# Altium PCB Transmitter.PcbDoc (part 1 of 2)
Units mm, origin at the board's own origin, x right, y up, seen from the top; angles counter-clockwise.
Board outline 94.9 x 125.8 mm, 2 copper layers (Top Layer, Bottom Layer); 250 components, 166 nets, 771 pads, 77 vias.
Unrouted connection lines stored in the file: 2.
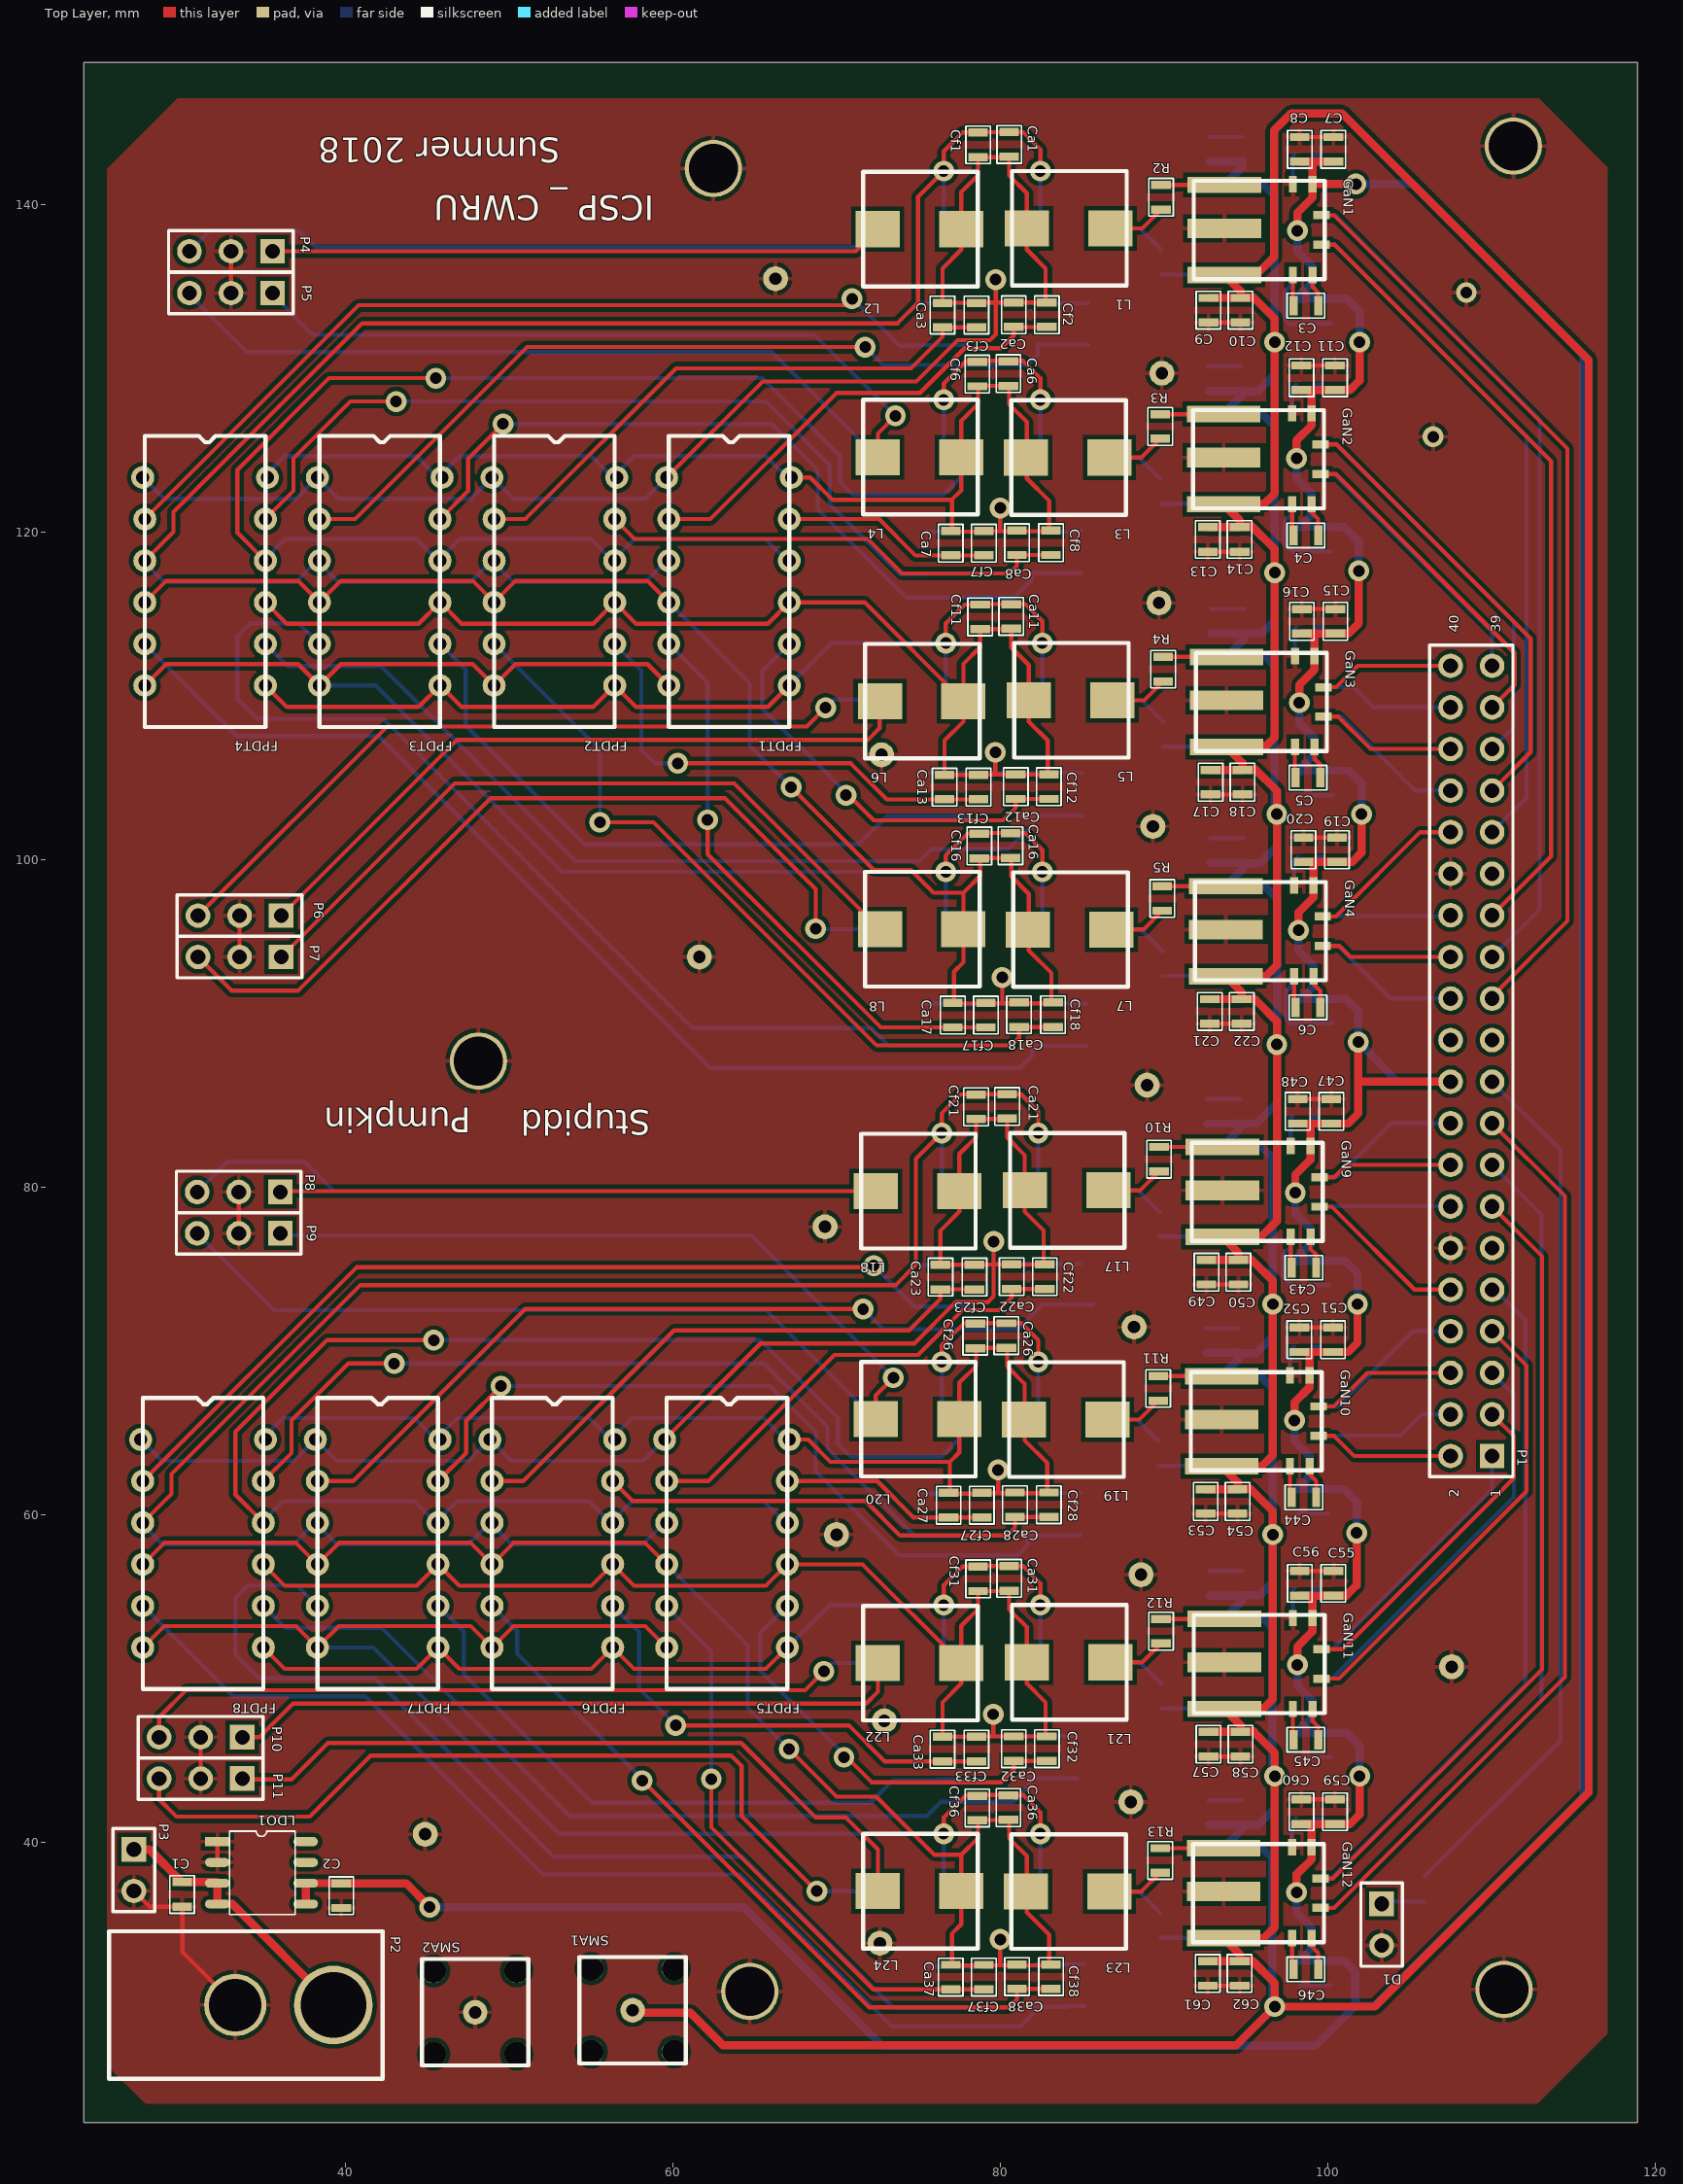
[diagram p0: Top Layer view]
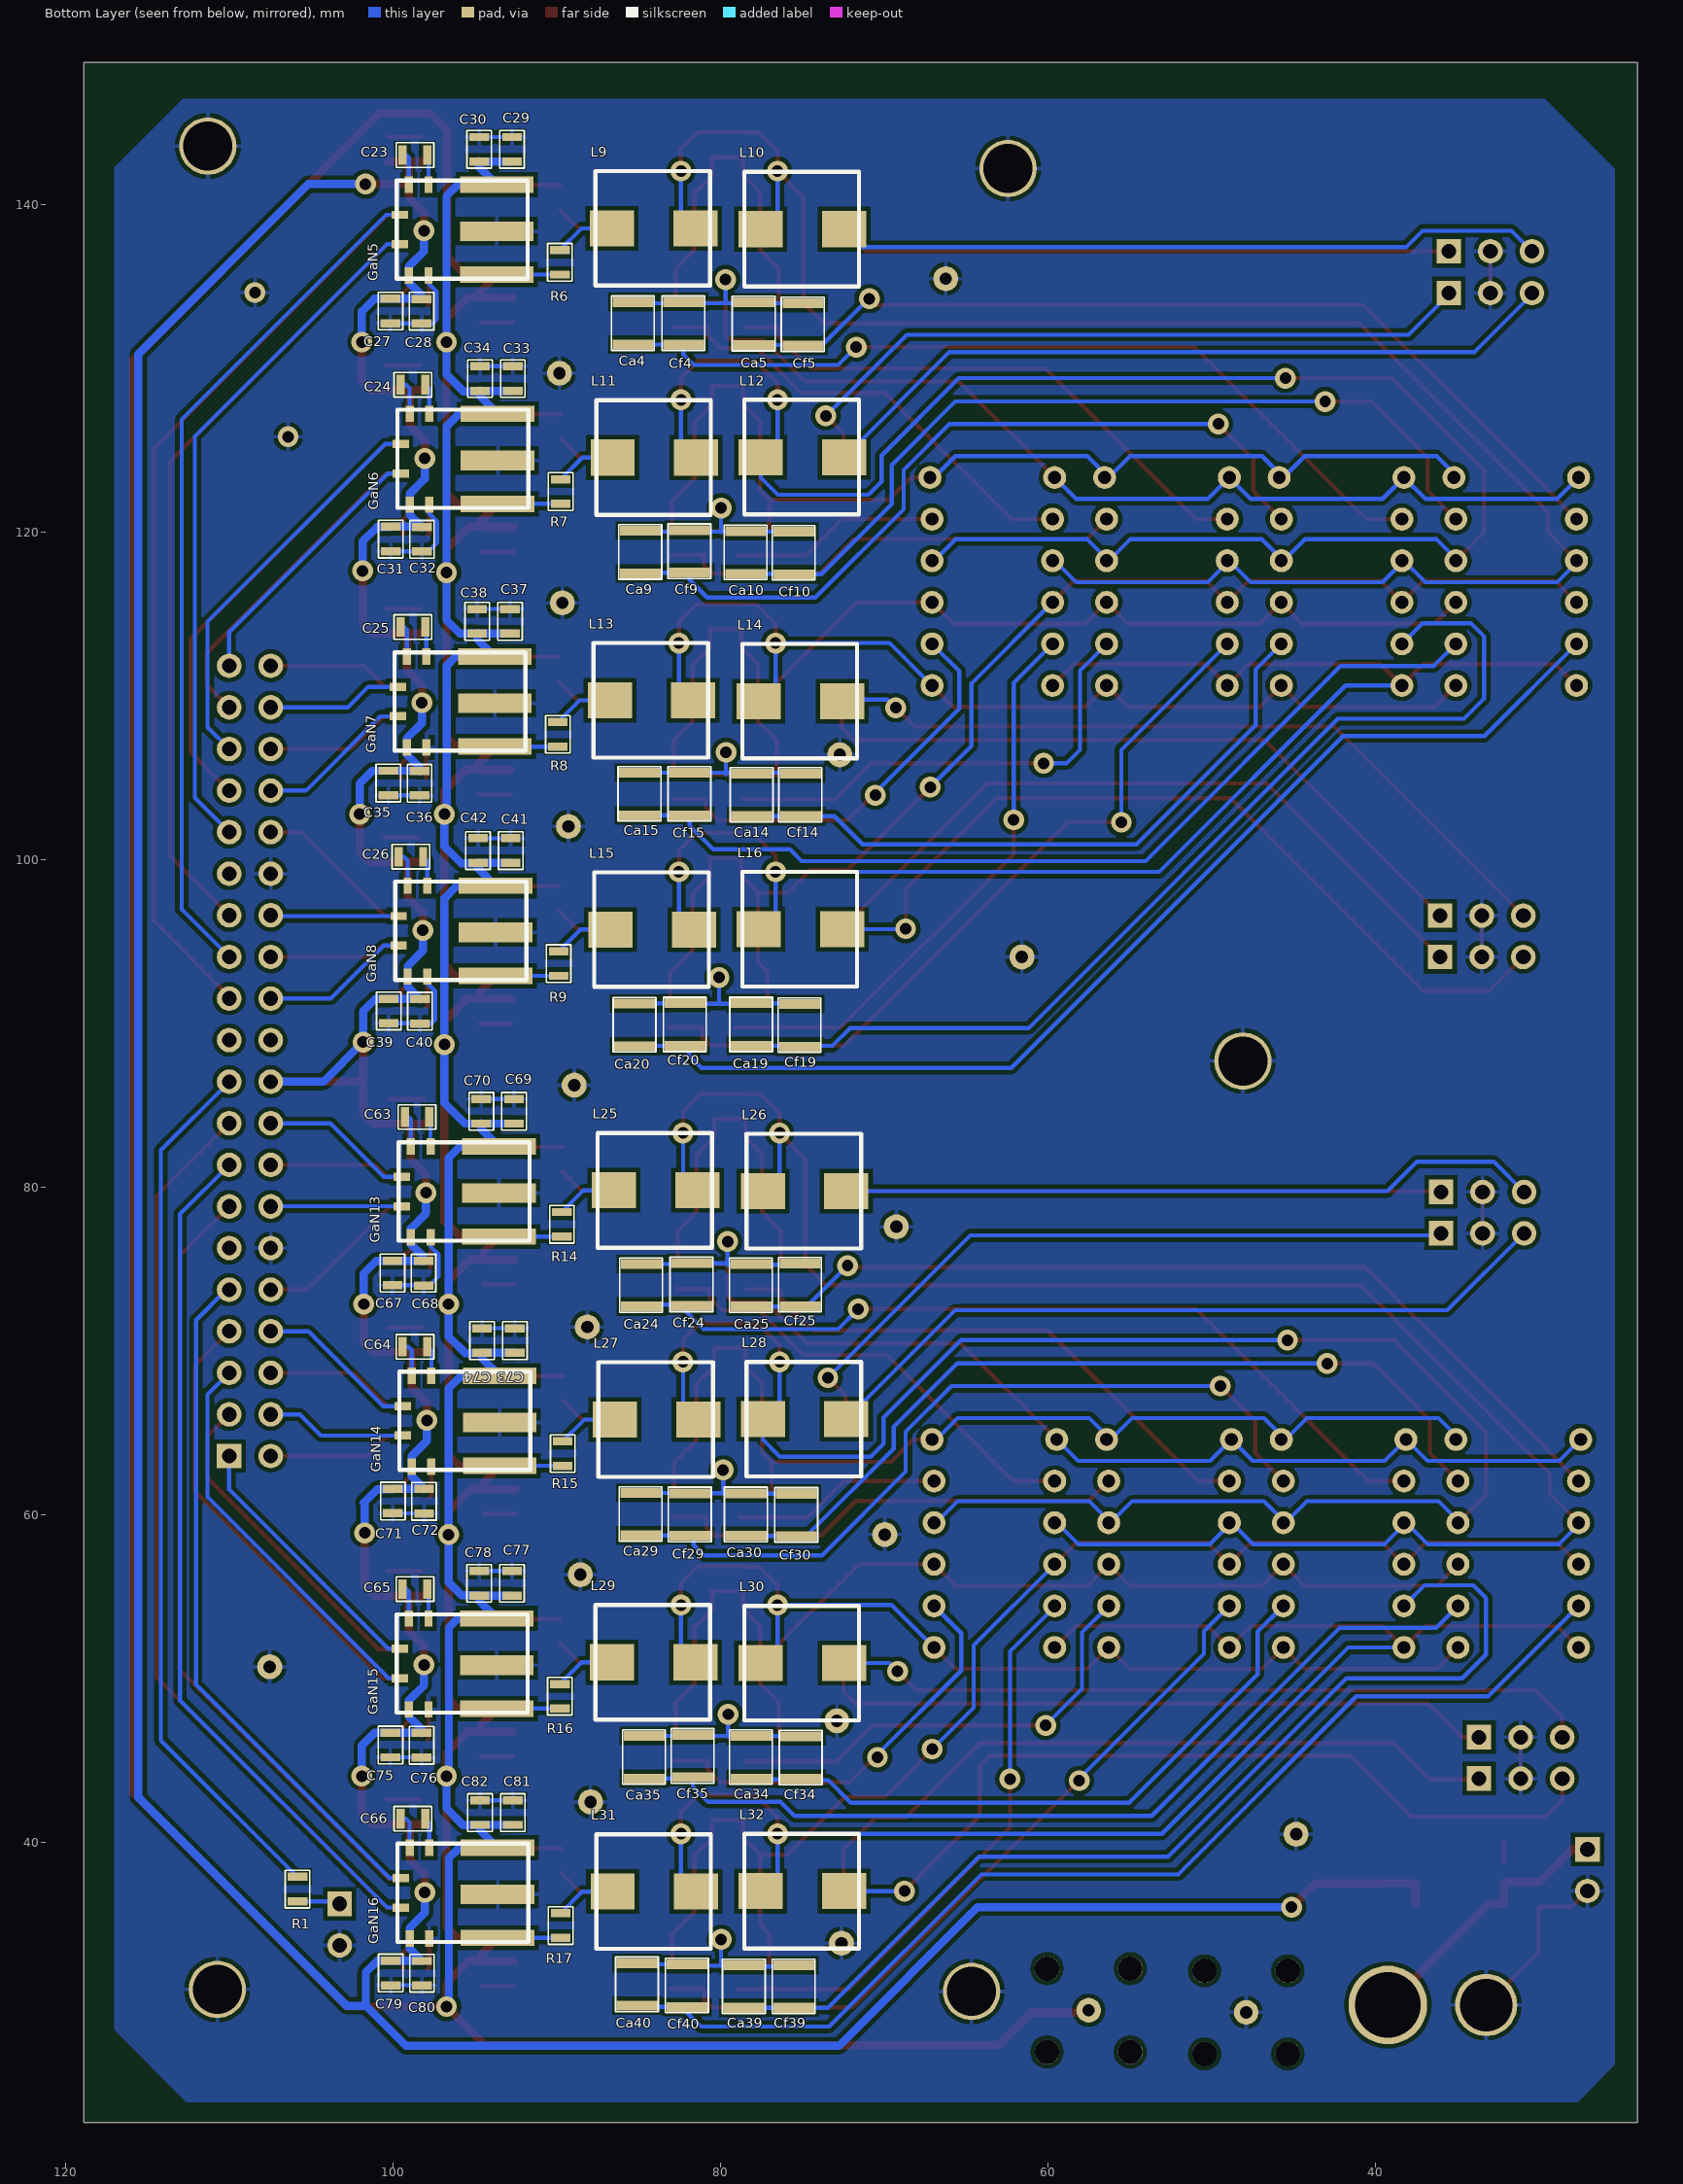
[diagram p1: Bottom Layer view, seen from below]

## Layer stack, top to bottom
Top Solder: solder mask 0.0102, Solder Resist, Dk 3.5
Top Layer: signal copper 0.0356
Dielectric 1: dielectric 0.32, FR-4, Dk 4.8
Bottom Layer: signal copper 0.0356
Bottom Solder: solder mask 0.0102, Solder Resist, Dk 3.5

## Board outline
24,22.875 118.9,22.875 118.9,148.675 24,148.675

## Design rules (kind name [scope] priority, off if disabled: settings)
Clearance [All] p1: gap=0.254
PolygonConnect [All] p1: connectstyle=Relief reliefconductorwidth=0.254 reliefentries=4 polygonreliefangle="90 Angle" airgapwidth=0.254
RoutingVias [All] p1: holewidth=0.711 width=1.27 viastyle="Through Hole" minholewidth=0.711 minwidth=1.27 maxholewidth=0.711 maxwidth=1.27
SolderMaskExpansion [All] p1: expansion=0.102
UnpouredPolygon [All] p1: allowunpoured=FALSE
Width Power_Width [(InNet('VCC') OR InNet('VGAN') OR InNet('V_BAT'))] p1: maxlimit=1 minlimit=0.254 preferedwidth=0.5 minimp=50.000000 maximp=50.000000 favimp=50.000000
Width [All] p2: maxlimit=0.254 minlimit=0.254 preferedwidth=0.254
29 further rules are at their usual default settings.

## Components (designator, comment, footprint, x,y, rotation, side; value= is the part's Value field where it differs from the comment)
C1 "Cap" 0805 30,36.8 r270 top
C2 "Cap" 0805 39.725,36.725 r270 top
C3 "Cap" 0805 98.65,133.825 r0 top
C4 "Cap" 0805 98.65,119.8 r0 top
C5 "Cap" 0805 98.775,105 r0 top
C6 "Cap" 0805 98.775,90.975 r0 top
C7 "Cap" 0805 100.325,143.375 r270 top
C8 "Cap" 0805 98.275,143.375 r90 top
C9 "Cap" 0805 92.7,133.55 r90 top
C10 "Cap" 0805 94.65,133.55 r90 top
C11 "Cap" 0805 100.425,129.425 r270 top
C12 "Cap" 0805 98.375,129.425 r90 top
C13 "Cap" 0805 92.65,119.55 r90 top
C14 "Cap" 0805 94.6,119.55 r90 top
C15 "Cap" 0805 100.45,114.55 r270 top
C16 "Cap" 0805 98.4,114.55 r90 top
C17 "Cap" 0805 92.825,104.725 r90 top
C18 "Cap" 0805 94.775,104.725 r90 top
C19 "Cap" 0805 100.55,100.6 r270 top
C20 "Cap" 0805 98.5,100.6 r90 top
C21 "Cap" 0805 92.775,90.725 r90 top
C22 "Cap" 0805 94.725,90.725 r90 top
C23 "Cap" 0805 98.675,143.025 r0 bottom
C24 "Cap" 0805 98.8,129 r0 bottom
C25 "Cap" 0805 98.8,114.2 r0 bottom
C26 "Cap" 0805 98.925,100.175 r0 bottom
C27 "Cap" 0805 100.175,133.5 r90 bottom
C28 "Cap" 0805 98.273,133.487 r270 bottom
C29 "Cap" 0805 92.75,143.375 r270 bottom
C30 "Cap" 0805 94.75,143.375 r270 bottom
C31 "Cap" 0805 100.15,119.575 r90 bottom
C32 "Cap" 0805 98.248,119.562 r270 bottom
C33 "Cap" 0805 92.7,129.375 r270 bottom
C34 "Cap" 0805 94.7,129.375 r270 bottom
C35 "Cap" 0805 100.3,104.675 r90 bottom
C36 "Cap" 0805 98.398,104.662 r270 bottom
C37 "Cap" 0805 92.875,114.55 r270 bottom
C38 "Cap" 0805 94.875,114.55 r270 bottom
C39 "Cap" 0805 100.275,90.75 r90 bottom
C40 "Cap" 0805 98.373,90.737 r270 bottom
C41 "Cap" 0805 92.825,100.55 r270 bottom
C42 "Cap" 0805 94.825,100.55 r270 bottom
C43 "Cap" 0805 98.525,75.075 r0 top (schematic designator C3)
C44 "Cap" 0805 98.525,61.05 r0 top
C45 "Cap" 0805 98.65,46.25 r0 top
C46 "Cap" 0805 98.65,32.225 r0 top
C47 "Cap" 0805 100.2,84.625 r270 top
C48 "Cap" 0805 98.15,84.625 r90 top
C49 "Cap" 0805 92.575,74.8 r90 top
C50 "Cap" 0805 94.525,74.8 r90 top
C51 "Cap" 0805 100.3,70.675 r270 top
C52 "Cap" 0805 98.25,70.675 r90 top
C53 "Cap" 0805 92.525,60.8 r90 top
C54 "Cap" 0805 94.475,60.8 r90 top
C55 "Cap" 0805 100.325,55.8 r270 top
C56 "Cap" 0805 98.275,55.8 r90 top
C57 "Cap" 0805 92.7,45.975 r90 top
C58 "Cap" 0805 94.65,45.975 r90 top
C59 "Cap" 0805 100.425,41.85 r270 top
C60 "Cap" 0805 98.375,41.85 r90 top
C61 "Cap" 0805 92.65,31.975 r90 top
C62 "Cap" 0805 94.6,31.975 r90 top
C63 "Cap" 0805 98.55,84.275 r0 bottom
C64 "Cap" 0805 98.675,70.25 r0 bottom
C65 "Cap" 0805 98.675,55.45 r0 bottom
C66 "Cap" 0805 98.8,41.425 r0 bottom
C67 "Cap" 0805 100.05,74.75 r90 bottom
C68 "Cap" 0805 98.148,74.737 r270 bottom
C69 "Cap" 0805 92.625,84.625 r270 bottom
C70 "Cap" 0805 94.625,84.625 r270 bottom
C71 "Cap" 0805 100.025,60.825 r90 bottom
C72 "Cap" 0805 98.123,60.812 r270 bottom
C73 "Cap" 0805 92.575,70.625 r270 bottom
C74 "Cap" 0805 94.575,70.625 r270 bottom
C75 "Cap" 0805 100.175,45.925 r90 bottom
C76 "Cap" 0805 98.273,45.912 r270 bottom
C77 "Cap" 0805 92.75,55.8 r270 bottom
C78 "Cap" 0805 94.75,55.8 r270 bottom
C79 "Cap" 0805 100.15,32 r90 bottom
C80 "Cap" 0805 98.248,31.987 r270 bottom
C81 "Cap" 0805 92.7,41.8 r270 bottom
C82 "Cap" 0805 94.7,41.8 r270 bottom
Ca1 "Cap" 0805 80.525,143.675 r270 top
Ca2 "Cap" 0805 80.8,133.275 r90 top
Ca3 "Cap" 0805 76.45,133.25 r90 top
Ca4 "Cap" 1210 85.35,131.45 r90 bottom
Ca5 "Cap" 1210 77.975,131.425 r90 bottom
Ca6 "Cap" 0805 80.475,129.675 r270 top
Ca7 "Cap" 0805 76.95,119.325 r90 top
Ca8 "Cap" 0805 81,119.35 r90 top
Ca9 "Cap" 1210 84.9,117.475 r90 bottom
Ca10 "Cap" 1210 78.475,117.45 r90 bottom
Ca11 "Cap" 0805 80.65,114.85 r270 top
Ca12 "Cap" 0805 80.925,104.45 r90 top
Ca13 "Cap" 0805 76.575,104.425 r90 top
Ca14 "Cap" 1210 78.1,102.65 r90 bottom
Ca15 "Cap" 1210 84.95,102.7 r90 bottom
Ca16 "Cap" 0805 80.6,100.85 r270 top
Ca17 "Cap" 0805 77.075,90.5 r90 top
Ca18 "Cap" 0805 81.125,90.525 r90 top
Ca19 "Cap" 1210 78.125,88.625 r90 bottom
Ca20 "Cap" 1210 85.25,88.6 r90 bottom
Ca21 "Cap" 0805 80.4,84.925 r270 top
Ca22 "Cap" 0805 80.675,74.525 r90 top
Ca23 "Cap" 0805 76.325,74.5 r90 top
Ca24 "Cap" 1210 84.85,72.7 r90 bottom
Ca25 "Cap" 1210 78.15,72.7 r90 bottom
Ca26 "Cap" 0805 80.35,70.925 r270 top
Ca27 "Cap" 0805 76.825,60.575 r90 top
Ca28 "Cap" 0805 80.875,60.6 r90 top
Ca29 "Cap" 1210 84.875,58.725 r90 bottom
Ca30 "Cap" 1210 78.45,58.7 r90 bottom
Ca31 "Cap" 0805 80.525,56.1 r270 top
Ca32 "Cap" 0805 80.8,45.7 r90 top
Ca33 "Cap" 0805 76.45,45.675 r90 top
Ca34 "Cap" 1210 78.15,43.875 r90 bottom
Ca35 "Cap" 1210 84.675,43.875 r90 bottom
Ca36 "Cap" 0805 80.475,42.1 r270 top
Ca37 "Cap" 0805 76.95,31.75 r90 top
Ca38 "Cap" 0805 81,31.775 r90 top
Ca39 "Cap" 1210 78.575,29.875 r90 bottom
Ca40 "Cap" 1210 85.1,30 r90 bottom
Cf1 "Cap" 0805 78.625,143.65 r270 top
Cf2 "Cap" 0805 82.825,133.275 r90 top
Cf3 "Cap" 0805 78.525,133.25 r90 top
Cf4 "Cap" 1210 82.275,131.45 r90 bottom
Cf5 "Cap" 1210 74.975,131.375 r90 bottom
Cf6 "Cap" 0805 78.575,129.65 r270 top
Cf7 "Cap" 0805 78.975,119.325 r90 top
Cf8 "Cap" 0805 83.075,119.35 r90 top
Cf9 "Cap" 1210 81.9,117.525 r90 bottom
Cf10 "Cap" 1210 75.525,117.425 r90 bottom
Cf11 "Cap" 0805 78.75,114.825 r270 top
Cf12 "Cap" 0805 82.95,104.45 r90 top
Cf13 "Cap" 0805 78.65,104.425 r90 top
Cf14 "Cap" 1210 75.125,102.65 r90 bottom
Cf15 "Cap" 1210 81.9,102.7 r90 bottom
Cf16 "Cap" 0805 78.7,100.825 r270 top
Cf17 "Cap" 0805 79.1,90.5 r90 top
Cf18 "Cap" 0805 83.2,90.525 r90 top
Cf19 "Cap" 1210 75.175,88.575 r90 bottom
Cf20 "Cap" 1210 82.175,88.625 r90 bottom
Cf21 "Cap" 0805 78.5,84.9 r270 top
Cf22 "Cap" 0805 82.7,74.525 r90 top
Cf23 "Cap" 0805 78.4,74.5 r90 top
Cf24 "Cap" 1210 81.775,72.75 r90 bottom
Cf25 "Cap" 1210 75.15,72.725 r90 bottom
Cf26 "Cap" 0805 78.45,70.9 r270 top
Cf27 "Cap" 0805 78.85,60.575 r90 top
Cf28 "Cap" 0805 82.95,60.6 r90 top
Cf29 "Cap" 1210 81.875,58.7 r90 bottom
Cf30 "Cap" 1210 75.375,58.675 r90 bottom
Cf31 "Cap" 0805 78.625,56.075 r270 top
Cf32 "Cap" 0805 82.825,45.7 r90 top
Cf33 "Cap" 0805 78.525,45.675 r90 top
Cf34 "Cap" 1210 75.1,43.85 r90 bottom
Cf35 "Cap" 1210 81.7,43.95 r90 bottom
Cf36 "Cap" 0805 78.575,42.075 r270 top
Cf37 "Cap" 0805 78.975,31.75 r90 top
Cf38 "Cap" 0805 83.075,31.775 r90 top
Cf39 "Cap" 1210 75.525,29.875 r90 bottom
Cf40 "Cap" 1210 82.05,29.925 r90 bottom
D1 "LED0" HDR1X2 103.275,36.225 r270 top
FPDT1 "Tyco_Electronics" Slide_Switch_4PDT 59.598,123.332 r270 top
FPDT2 "Tyco_Electronics" Slide_Switch_4PDT 48.93,123.332 r270 top
FPDT3 "Tyco_Electronics" Slide_Switch_4PDT 38.262,123.332 r270 top
FPDT4 "Tyco_Electronics" Slide_Switch_4PDT 27.594,123.332 r270 top
FPDT5 "Tyco_Electronics" Slide_Switch_4PDT 59.473,64.582 r270 top
FPDT6 "Tyco_Electronics" Slide_Switch_4PDT 48.805,64.582 r270 top
FPDT7 "Tyco_Electronics" Slide_Switch_4PDT 38.137,64.582 r270 top
FPDT8 "Tyco_Electronics" Slide_Switch_4PDT 27.469,64.582 r270 top
GaN1 "LMG5200" QFM(9) 99.8,141.45 r270 top
GaN2 "LMG5200" QFM(9) 99.75,127.45 r270 top
GaN3 "LMG5200" QFM(9) 99.925,112.625 r270 top
GaN4 "LMG5200" QFM(9) 99.875,98.625 r270 top
GaN5 "LMG5200" QFM(9) 99.8,135.475 r90 bottom
GaN6 "LMG5200" QFM(9) 99.75,121.475 r90 bottom
GaN7 "LMG5200" QFM(9) 99.925,106.65 r90 bottom
GaN8 "LMG5200" QFM(9) 99.875,92.65 r90 bottom
GaN9 "LMG5200" QFM(9) 99.675,82.7 r270 top
GaN10 "LMG5200" QFM(9) 99.625,68.7 r270 top
GaN11 "LMG5200" QFM(9) 99.8,53.875 r270 top
GaN12 "LMG5200" QFM(9) 99.75,39.875 r270 top
GaN13 "LMG5200" QFM(9) 99.675,76.725 r90 bottom
GaN14 "LMG5200" QFM(9) 99.625,62.725 r90 bottom
GaN15 "LMG5200" QFM(9) 99.8,47.9 r90 bottom
GaN16 "LMG5200" QFM(9) 99.75,33.9 r90 bottom
L1 "Inductor" Inductor_2 86.7,138.55 r180 top
L2 "Inductor" Inductor_2 77.6,138.5 r180 top
L3 "Inductor" Inductor_2 86.65,124.55 r180 top
L4 "Inductor" Inductor_2 77.6,124.575 r180 top
L5 "Inductor" Inductor_2 86.825,109.725 r180 top
L6 "Inductor" Inductor_2 77.725,109.675 r180 top
L7 "Inductor" Inductor_2 86.775,95.725 r180 top
L8 "Inductor" Inductor_2 77.725,95.75 r180 top
L9 "Inductor" Inductor_2 86.65,138.55 r180 bottom
L10 "Inductor" Inductor_2 77.55,138.5 r180 bottom
L11 "Inductor" Inductor_2 86.6,124.55 r180 bottom
L12 "Inductor" Inductor_2 77.55,124.575 r180 bottom
L13 "Inductor" Inductor_2 86.775,109.725 r180 bottom
L14 "Inductor" Inductor_2 77.675,109.675 r180 bottom
L15 "Inductor" Inductor_2 86.725,95.725 r180 bottom
L16 "Inductor" Inductor_2 77.675,95.75 r180 bottom
L17 "Inductor" Inductor_2 86.575,79.8 r180 top
L18 "Inductor" Inductor_2 77.475,79.75 r180 top
L19 "Inductor" Inductor_2 86.525,65.8 r180 top
L20 "Inductor" Inductor_2 77.475,65.825 r180 top
L21 "Inductor" Inductor_2 86.7,50.975 r180 top
L22 "Inductor" Inductor_2 77.6,50.925 r180 top
L23 "Inductor" Inductor_2 86.65,36.975 r180 top
L24 "Inductor" Inductor_2 77.6,37 r180 top
L25 "Inductor" Inductor_2 86.525,79.8 r180 bottom
L26 "Inductor" Inductor_2 77.425,79.75 r180 bottom
L27 "Inductor" Inductor_2 86.475,65.8 r180 bottom
L28 "Inductor" Inductor_2 77.425,65.825 r180 bottom
L29 "Inductor" Inductor_2 86.65,50.975 r180 bottom
L30 "Inductor" Inductor_2 77.55,50.925 r180 bottom
L31 "Inductor" Inductor_2 86.6,36.975 r180 bottom
L32 "Inductor" Inductor_2 77.55,37 r180 bottom
LDO1 "TPS76750" SOIC-8 32.15,40.025 r0 top
P1 "FPGA_GPIO" HDR2X20 110.025,63.575 r90 top
P2 "Power_Jack" Power_Jack 39.243,30.047 r0 top
P3 "Aux_Power" HDR1X2 27.05,39.55 r270 top
P4 "Output" HDR1X3 35.525,137.15 r180 top
P5 "Output" HDR1X3 35.525,134.6 r180 top
P6 "Output" HDR1X3 36.05,96.575 r180 top
P7 "Output" HDR1X3 36.05,94.05 r180 top
P8 "Output" HDR1X3 36,79.7 r180 top
P9 "Output" HDR1X3 36,77.175 r180 top
P10 "Output" HDR1X3 33.675,46.4 r180 top
P11 "Output" HDR1X3 33.675,43.875 r180 top
R1 "Res1" 0805 105.85,37.125 r270 bottom
R2 "Res1" 0805 89.8,140.45 r270 top
R3 "Res1" 0805 89.75,126.45 r270 top
R4 "Res1" 0805 89.925,111.625 r270 top
R5 "Res1" 0805 89.875,97.625 r270 top
R6 "Res1" 0805 89.825,136.475 r90 bottom
R7 "Res1" 0805 89.775,122.475 r90 bottom
R8 "Res1" 0805 89.95,107.65 r90 bottom
R9 "Res1" 0805 89.9,93.65 r90 bottom
R10 "Res1" 0805 89.675,81.7 r270 top
R11 "Res1" 0805 89.625,67.7 r270 top
R12 "Res1" 0805 89.8,52.875 r270 top
R13 "Res1" 0805 89.75,38.875 r270 top
R14 "Res1" 0805 89.7,77.725 r90 bottom
R15 "Res1" 0805 89.65,63.725 r90 bottom
R16 "Res1" 0805 89.825,48.9 r90 bottom
R17 "Res1" 0805 89.775,34.9 r90 bottom
SMA1 "SMA" SMA 57.525,29.725 r0 top
SMA2 "SMA" SMA 47.9,29.6 r0 top

## Footprints (in the part's own frame and the unit in brackets; to place one, negate y for a bottom-side part, rotate by r counter-clockwise, add the part's x,y. Pads: shape width x height; smd on the part's side, far side on the other; paste and mask are expansions set on the pad)
0805 [mm]
  rect 0.5x1.2 smd: 1(-0.75,0) 2(0.75,0)
  silkscreen extent -1.15,-0.75 1.15,0.75
1210 [mm]
  rect 0.6x2.5 smd: 1(0,0) 2(2.6,0)
  silkscreen extent -0.36,-1.3 2.97,1.32
HDR1X2 [mm] "Connector; Header; 2 Position"
  rect 1.5x1.5 hole 0.9: 1(0,0)
  round 1.5 hole 0.9: 2(2.54,0)
  silkscreen extent -1.27,-1.27 3.81,1.27
HDR1X3 [mm] "Connector; Header; 3 Position"
  rect 1.5x1.5 hole 0.9: 1(0,0)
  round 1.5 hole 0.9: 2(2.54,0) 3(5.08,0)
  silkscreen extent -1.27,-1.27 6.35,1.27
HDR2X20 [mm] "Connector; Header; 20x2 Position"
  rect 1.5x1.5 hole 0.9: 1(0,0)
  round 1.5 hole 0.9: 2(0,2.54) 3(2.54,0) 4(2.54,2.54) 5(5.08,0) 6(5.08,2.54) 7(7.62,0) 8(7.62,2.54) 9(10.16,0) 10(10.16,2.54) 11(12.7,0) 12(12.7,2.54) 13(15.24,0) 14(15.24,2.54) 15(17.78,0) 16(17.78,2.54) 17(20.32,0) 18(20.32,2.54) 19(22.86,0) 20(22.86,2.54) 21(25.4,0) 22(25.4,2.54) 23(27.94,0) 24(27.94,2.54) 25(30.48,0) 26(30.48,2.54) 27(33.02,0) 28(33.02,2.54) 29(35.56,0) 30(35.56,2.54) 31(38.1,0) 32(38.1,2.54) 33(40.64,0) 34(40.64,2.54) 35(43.18,0) 36(43.18,2.54) 37(45.72,0) 38(45.72,2.54) 39(48.26,0) 40(48.26,2.54)
  silkscreen extent -1.27,-1.27 49.53,3.81
Inductor_2 [mm] "WE"
  rect 2.7x2.2 smd mask+0.2: 1(0,0) 2(5.1,0)
  silkscreen extent -1,-3.5 6,3.5
Power_Jack [mm] "CUI"
  round 4.8 hole 4 mask+0.2: 1(0,0)
  round 3.8 hole 3.2 mask+0.2: 2(-6,0)
  silkscreen extent -13.7,-4.5 3,4.5
QFM(9) [mm] "LMG5200;"
  rect 1x4.5 smd: 1(5.75,-6.125) 8(0.25,-6.125)
  rect 1x0.5 smd: 2(5.75,-1.95) 3(5.75,-0.75) 6(0.2,-0.75) 7(0.2,-1.95)
  rect 0.5x1 smd: 4(3.9,-0.2) 5(2.1,-0.2)
  rect 1.2x4.5 smd: 9(2.9,-6.125)
  silkscreen extent 0,-8 6,0
Slide_Switch_4PDT [mm] "Tyco_Electronics"
  round 1.4 hole 0.79 mask+0.2: 1(0,0) 2(2.54,0.127) 3(5.08,0.127) 4(7.62,0.127) 5(10.16,0.127) 6(12.7,0.127) 7(12.7,7.493) 8(10.16,7.493) 9(7.62,7.493) 10(5.08,7.493) 11(2.54,7.493) 12(0,7.62)
  silkscreen extent -2.54,0.13 15.24,7.49
SMA [mm]
  round 1.5 hole 0.762: 1(0,0)
  round 1.5 hole 1.5 paste+0 mask+0: Sh1(-2.54,2.54) Sh2(-2.54,-2.54) Sh3(2.54,-2.54) Sh4(2.54,2.54)
  silkscreen extent -3.25,-3.25 3.25,3.25
SOIC-8 [mm]
  rect 1.5x0.55 smd: 1(0,0)
  oval 1.5x0.55 smd: 2(0,-1.27) 3(0,-2.54) 4(0,-3.81) 5(5.4,-3.81) 6(5.4,-2.54) 7(5.4,-1.27) 8(5.4,0)
  silkscreen extent 0.75,-4.44 4.75,0.64

## Part data
C1 C2 C3 C4 C5 C6 C7 C8 C9 C10 C11 C12 C13 C14 C15 C16 C17 C18 C19 C20 C21 C22 C23 C24 C25 C26 C27 C28 C29 C30 C31 C32 C33 C34 C35 C36 C37 C38 C39 C40 C41 C42 C43 C44 C45 C46 C47 C48 C49 C50 C51 C52 C53 C54 C55 C56 C57 C58 C59 C60 C61 C62 C63 C64 C65 C66 C67 C68 C69 C70 C71 C72 C73 C74 C75 C76 C77 C78 C79 C80 C81 C82 Ca1 Ca2 Ca3 Ca4 Ca5 Ca6 Ca7 Ca8 Ca9 Ca10 Ca11 Ca12 Ca13 Ca14 Ca15 Ca16 Ca17 Ca18 Ca19 Ca20 Ca21 Ca22 Ca23 Ca24 Ca25 Ca26 Ca27 Ca28 Ca29 Ca30 Ca31 Ca32 Ca33 Ca34 Ca35 Ca36 Ca37 Ca38 Ca39 Ca40 Cf1 Cf2 Cf3 Cf4 Cf5 Cf6 Cf7 Cf8 Cf9 Cf10 Cf11 Cf12 Cf13 Cf14 Cf15 Cf16 Cf17 Cf18 Cf19 Cf20 Cf21 Cf22 Cf23 Cf24 Cf25 Cf26 Cf27 Cf28 Cf29 Cf30 Cf31 Cf32 Cf33 Cf34 Cf35 Cf36 Cf37 Cf38 Cf39 Cf40: "Capacitor"
D1: "Typical INFRARED GaAs LED"
FPDT1 FPDT2 FPDT3 FPDT4 FPDT5 FPDT6 FPDT7 FPDT8: library part 4PDT
LDO1: library part TPS767
P1: library part "Header 20X2", "Header, 20-Pin, Dual row"
P2 P3: library part "Header 2", "Header, 2-Pin"
P4 P5 P6 P7 P8 P9 P10 P11: library part "Header 3", "Header, 3-Pin"
R1 R2 R3 R4 R5 R6 R7 R8 R9 R10 R11 R12 R13 R14 R15 R16 R17: "Resistor"
SMA1 SMA2: library part "Header 1"

## Free pads (board coordinates)
  round 3.5 hole 3 mask+0: 0(48.1,87.7) 0(62.45,142.2) 0(64.675,30.875) 0(110.75,31) 0(111.325,143.575)
  round 1.524 hole 0.762: 0(107.55,50.7) 1(89.85,129.7) 2(89.675,115.675) 3(89.3,102.025) 4(88.95,86.225) 5(88.15,71.45) 6(88.575,56.325) 7(87.95,42.45) 8(69.275,77.575) 9(69.975,58.775) 10(72.9,47.4) 11(72.625,33.825) 12(72.725,106.4) 13(66.25,135.475) 14(61.6,94.05) 15(44.85,40.475)

## Via types
v1: diameter 1.27, hole 0.711, Top Layer to Bottom Layer, 77 vias

## Nets (pads, with @x,y where several pads share a name; then routed paths per layer and width w, separated by ;. In a path a pad name is that pad's centre, name@x,y a point inside that pad or via, vN(x,y) a via of type N, cw(c..) or ccw(c..) an arc to the next point about the centre after c; other vN are vias at no path point)
A1: Ca2.1 Cf2.1 FPDT1.2 | length 28.3
  Top Layer w0.254: FPDT1.2@59.725,120.792 62.267,120.792 69.975,128.5 75.075,128.5 77.8,131.225 80.025,131.225 80.8,132 Ca2.1@80.8,132.525 Cf2.1@82.825,132.525
A2: Ca7.1 Cf7.1 FPDT1.11 | length 12.8
  Top Layer w0.254: FPDT1.11@67.091,120.792 72.583,120.792 74.8,118.575 Ca7.1@76.95,118.575 Cf7.1@78.975,118.575
A3: Ca12.1 Cf12.1 FPDT1.8 | length 25.9
  Top Layer w0.254: v1(70.55,103.925) 70.725,103.925 72.25,102.4 80.15,102.4 80.925,103.175 Ca12.1@80.925,103.7 Cf12.1@82.95,103.7
  Bottom Layer w0.254: FPDT1.8@67.091,113.172 65.425,111.506 65.425,109.225 70.55,104.1 v1(70.55,103.925)
A4: Ca17.1 Cf17.1 FPDT1.5 | length 35.2
  Top Layer w0.254: v1(62.1,102.425) 62.1,100.325 72.675,89.75 Ca17.1@77.075,89.75 Cf17.1@79.1,89.75
  Bottom Layer w0.254: FPDT1.5@59.725,113.172 62.099,110.799 62.1,110.8 v1(62.1,102.425)
A5: Ca22.1 Cf22.1 FPDT5.2 | length 28.3
  Top Layer w0.254: FPDT5.2@59.6,62.042 62.142,62.042 69.85,69.75 74.95,69.75 77.675,72.475 79.9,72.475 80.675,73.25 Ca22.1@80.675,73.775 Cf22.1@82.7,73.775
A6: Ca27.1 Cf27.1 FPDT5.11 | length 12.8
  Top Layer w0.254: FPDT5.11@66.966,62.042 72.458,62.042 74.675,59.825 Ca27.1@76.825,59.825 Cf27.1@78.85,59.825
A7: Ca32.1 Cf32.1 FPDT5.8 | length 25.9
  Top Layer w0.254: v1(70.425,45.175) 70.6,45.175 72.125,43.65 80.025,43.65 80.8,44.425 Ca32.1@80.8,44.95 Cf32.1@82.825,44.95
  Bottom Layer w0.254: FPDT5.8@66.966,54.422 65.3,52.756 65.3,50.475 70.425,45.35 v1(70.425,45.175)
A8: Ca37.1 Cf37.1 FPDT5.5 | length 35.4
  Top Layer w0.254: v1(62.325,43.85) 62.325,40.9 72.225,31 Ca37.1@76.95,31 Cf37.1@78.975,31
  Bottom Layer w0.254: FPDT5.5@59.6,54.422 59.6,54.375 62.325,51.65 v1(62.325,43.85)
B1: Ca3.1 Cf3.1 FPDT2.2 | length 34.7
  Top Layer w0.254: FPDT2.2@49.057,120.792 50.967,120.792 60.175,130 74.525,130 76.45,131.925 Ca3.1@76.45,132.5 Cf3.1@78.525,132.5
B2: Ca8.1 Cf8.1 FPDT2.11 | length 28.9
  Top Layer w0.254: FPDT2.11@56.423,120.792 57.64,119.575 71.875,119.575 73.975,117.475 80.525,117.475 81,117.95 Ca8.1@81,118.6 Cf8.1@83.075,118.6
B3: Ca13.1 Cf13.1 FPDT2.8 | length 29
  Top Layer w0.254: v1(60.275,105.875) 70.85,105.875 73.05,103.675 Ca13.1@76.575,103.675 Cf13.1@78.65,103.675
  Bottom Layer w0.254: FPDT2.8@56.423,113.172 58.05,111.545 58.05,106.7 58.875,105.875 v1(60.275,105.875)
B4: Ca18.1 Cf18.1 FPDT2.5 | length 47.7
  Top Layer w0.254: v1(55.525,102.275) 58.8,102.275 72.425,88.65 80.65,88.65 81.125,89.125 Ca18.1@81.125,89.775 Cf18.1@83.2,89.775
  Bottom Layer w0.254: FPDT2.5@49.057,113.172 55.525,106.704 v1(55.525,102.275)
B5: Ca23.1 Cf23.1 FPDT6.2 | length 34.7
  Top Layer w0.254: FPDT6.2@48.932,62.042 50.842,62.042 60.05,71.25 74.4,71.25 76.325,73.175 Ca23.1@76.325,73.75 Cf23.1@78.4,73.75
B6: Ca28.1 Cf28.1 FPDT6.11 | length 28.9
  Top Layer w0.254: FPDT6.11@56.298,62.042 57.515,60.825 71.75,60.825 73.85,58.725 80.4,58.725 80.875,59.2 Ca28.1@80.875,59.85 Cf28.1@82.95,59.85
B7: Ca33.1 Cf33.1 FPDT6.8 | length 28.2
  Top Layer w0.254: v1(60.15,47.125) 70.725,47.125 72.925,44.925 Ca33.1@76.45,44.925 Cf33.1@78.525,44.925
  Bottom Layer w0.254: FPDT6.8@56.298,54.422 57.925,52.795 57.925,49.35 v1(60.15,47.125)
B8: Ca38.1 Cf38.1 FPDT6.5 | length 46.1
  Top Layer w0.254: v1(58.1,43.75) 58.1,43.775 71.975,29.9 80.525,29.9 81,30.375 Ca38.1@81,31.025 Cf38.1@83.075,31.025
  Bottom Layer w0.254: FPDT6.5@48.932,54.422 50.475,52.879 50.475,51.5 58.1,43.875 v1(58.1,43.75)
C1: Ca4.1 Cf4.1 FPDT3.2 | length 52.7
  Top Layer w0.254: FPDT3.2@38.389,120.792 40.567,120.792 51.075,131.3 v1(71.725,131.3)
  Bottom Layer w0.254: v1(71.725,131.3) 72.825,130.2 81.65,130.2 82.275,130.825 Cf4.1@82.275,131.45 Ca4.1@85.35,131.45
C2: Ca9.1 Cf9.1 FPDT3.11 | length 49.4
  Top Layer w0.254: FPDT3.11@45.755,120.792 47.475,122.512 47.475,124.475 v1(49.6,126.6)
  Bottom Layer w0.254: v1(49.6,126.6) 66.025,126.6 68.825,123.8 68.825,121.4 74.225,116 80.825,116 81.9,117.075 Cf9.1@81.9,117.525 84.85,117.525 Ca9.1@84.9,117.475
C3: Ca14.1 Cf14.1 FPDT3.8 | length 40.1
  Bottom Layer w0.254: FPDT3.8@45.755,113.172 47.325,111.602 47.325,108.2 54.6,100.925 71.325,100.925 73.05,102.65 Cf14.1@75.125,102.65 Ca14.1@78.1,102.65
C4: Ca19.1 Cf19.1 FPDT3.5 | length 63.2
  Bottom Layer w0.254: FPDT3.5@38.389,113.172 37.136,114.425 34.15,114.425 33.375,113.65 33.375,109.825 34.6,108.6 42.3,108.6 61.2,89.7 72.1,89.7 73.175,88.625 Ca19.1@78.125,88.625
C5: Ca24.1 Cf24.1 FPDT7.2 | length 52.9
  Top Layer w0.254: FPDT7.2@38.264,62.042 40.442,62.042 50.95,72.55 v1(71.6,72.55)
  Bottom Layer w0.254: v1(71.6,72.55) 72.825,71.325 81.05,71.325 82.55,72.825 85.65,72.825 Ca24.1@85.675,72.85
C6: Ca29.1 Cf29.1 FPDT7.11 | length 49.3
  Top Layer w0.254: FPDT7.11@45.63,62.042 47.35,63.762 47.35,65.725 v1(49.475,67.85)
  Bottom Layer w0.254: v1(49.475,67.85) 65.9,67.85 68.7,65.05 68.7,62.625 73.825,57.5 81.025,57.5 81.65,58.125 81.65,58.675 81.7,58.725 Ca29.1@84.875,58.725
C7: Ca34.1 Cf34.1 FPDT7.8 | length 40.5
  Bottom Layer w0.254: FPDT7.8@45.63,54.422 47.2,52.852 47.2,50.25 55.05,42.4 72.05,42.4 73.425,43.775 76.15,43.775 76.2,43.825 Ca34.1@79,43.825
C8: Ca39.1 Cf39.1 FPDT7.5 | length 63.9
  Bottom Layer w0.254: FPDT7.5@38.264,54.422 37.011,55.675 34.025,55.675 33.25,54.9 33.25,51.45 34.7,50 41.775,50 52.675,39.1 64.225,39.1 73.45,29.875 Ca39.1@78.925,29.875
D1: Ca5.1 Cf5.1 FPDT4.2 | length 57.2
  Top Layer w0.254: FPDT4.2@27.721,120.792 40.779,133.85 v1@71.3,133.85
  Bottom Layer w0.254: v1(70.925,134.25) 70.975,134.25 73.85,131.375 Cf5.1@74.975,131.375 75.025,131.425 Ca5.1@77.975,131.425
D1NH: GaN5.4 P1.25 | length 52.5
  Bottom Layer w0.254: GaN5.4@99.6,139.375 100.425,139.375 112.925,126.875 112.925,96.955 P1.25@110.025,94.055
D1NL: GaN5.5 P1.31 | length 42.1
  Bottom Layer w0.254: GaN5.5@99.6,137.575 100.4,137.575 112.125,125.85 112.125,103.775 P1.31@110.237,101.887
D1PH: GaN1.4 P1.27 | length 48.7
  Top Layer w0.254: GaN1.4@99.6,137.55 100.4,137.55 113.625,124.325 113.625,100.195 P1.27@110.025,96.595
D1PL: GaN1.5 P1.23 | length 56.5
  Top Layer w0.254: GaN1.5@99.6,139.35 100.375,139.35 114.625,125.1 114.625,96.25 110.09,91.715 P1.23@110.09,91.45
D2: Ca10.1 Cf10.1 FPDT4.11 | length 53.3
  Top Layer w0.254: FPDT4.11@35.087,120.792 36.807,122.512 36.807,124.507 40.275,127.975 v1(43.075,127.975)
  Bottom Layer w0.254: v1(43.075,127.975) 65.675,127.975 69.55,124.1 69.55,121.725 73.85,117.425 Cf10.1@75.525,117.425 75.55,117.45 Ca10.1@78.475,117.45
D2NH: GaN6.4 P1.35 | length 24.6
  Bottom Layer w0.254: GaN6.4@99.55,125.375 100.5,125.375 111.35,114.525 111.35,108.08 P1.35@110.025,106.755
D2NL: GaN6.5 P1.39 | length 16.5
  Bottom Layer w0.254: GaN6.5@99.55,123.575 100.35,123.575 110.025,113.9 P1.39@110.025,111.835
D2PH: GaN2.4 P1.37 | length 20.3
  Top Layer w0.254: GaN2.4@99.55,123.55 100.475,123.55 111.4,112.625 111.4,110.67 P1.37@110.025,109.295
D2PL: GaN2.5 P1.33 | length 28
  Top Layer w0.254: GaN2.5@99.55,125.35 100.525,125.35 112.375,113.5 112.375,106.565 P1.33@110.025,104.215
D3: Ca15.1 Cf15.1 FPDT4.8 | length 56.9
  Bottom Layer w0.254: FPDT4.8@35.087,113.172 36.434,111.825 42.125,111.825 54.05,99.9 75.05,99.9 75.775,100.625 80.45,100.625 81.9,102.075 Cf15.1@81.9,102.7 Ca15.1@84.95,102.7
D3NH: GaN7.4 P1.38 | length 8.3
  Bottom Layer w0.254: GaN7.4@99.725,110.55 101.525,110.55 102.78,109.295 P1.38@107.485,109.295
D3NL: GaN7.5 P1.34 | length 9.6
  Bottom Layer w0.254: GaN7.5@99.725,108.75 100.8,108.75 105.335,104.215 P1.34@107.485,104.215
D3PH: GaN3.4 P1.36 | length 8.6
  Top Layer w0.254: GaN3.4@99.725,108.725 100.625,108.725 102.595,106.755 P1.36@107.485,106.755
D3PL: GaN3.5 P1.40 | length 8.3
  Top Layer w0.254: GaN3.5@99.725,110.525 100.5,110.525 101.81,111.835 P1.40@107.485,111.835
D4: Ca20.1 Cf20.1 FPDT4.5 | length 69
  Bottom Layer w0.254: FPDT4.5@27.721,113.172 33.343,107.55 41.975,107.55 62.25,87.275 81.175,87.275 81.925,88.025 81.925,88.375 Cf20.1@82.175,88.625 85.225,88.625 Ca20.1@85.25,88.6
D4NH: GaN8.4 P1.28 | length 7.8
  Bottom Layer w0.254: GaN8.4@99.675,96.55 P1.28@107.44,96.55
D4NL: GaN8.5 P1.24 | length 9.1
  Bottom Layer w0.254: GaN8.5@99.675,94.75 100.575,94.75 103.81,91.515 P1.24@107.485,91.515
D4PH: GaN4.4 P1.26 | length 8.1
  Top Layer w0.254: GaN4.4@99.675,94.725 100.7,94.725 101.37,94.055 P1.26@107.485,94.055
D4PL: GaN4.5 P1.32 | length 9.9
  Top Layer w0.254: GaN4.5@99.675,96.525 100.475,96.525 105.625,101.675 P1.32@107.485,101.675
D5: Ca25.1 Cf25.1 FPDT8.2 | length 57
  Top Layer w0.254: FPDT8.2@27.596,62.042 40.654,75.1 72.15,75.1 v1(72.25,75.2)
  Bottom Layer w0.254: v1(72.25,75.2) 74.75,72.7 Ca25.1@78.15,72.7
D5NH: GaN13.4 P1.18 | length 9.4
  Bottom Layer w0.254: GaN13.4@99.475,80.625 100.575,80.625 103.845,83.895 P1.18@107.485,83.895
D5NL: GaN13.5 P1.14 | length 8
  Bottom Layer w0.254: GaN13.5@99.475,78.825 P1.14@107.475,78.825
D5PH: GaN9.4 P1.10 | length 10.1
  Top Layer w0.254: GaN9.4@99.475,78.8 100.225,78.8 105.29,73.735 P1.10@107.485,73.735
D5PL: GaN9.5 P1.16 | length 8.3
  Top Layer w0.254: GaN9.5@99.475,80.6 100.375,80.6 101.13,81.355 P1.16@107.485,81.355
D6: Ca30.1 Cf30.1 FPDT8.11 | length 52.8
  Top Layer w0.254: FPDT8.11@34.962,62.042 36.682,63.762 36.682,65.757 40.15,69.225 v1(42.95,69.225)
  Bottom Layer w0.254: v1(42.95,69.225) 65.55,69.225 69.425,65.35 69.425,64.025 74.75,58.7 Ca30.1@78.45,58.7
D6NH: GaN14.4 P1.8 | length 10
  Bottom Layer w0.254: GaN14.4@99.425,66.625 100.625,66.625 105.195,71.195 P1.8@107.485,71.195
D6NL: GaN14.5 P1.4 | length 8.6
  Bottom Layer w0.254: GaN14.5@99.425,64.825 104.425,64.825 105.715,66.115 P1.4@107.485,66.115
D6PH: GaN10.4 P1.2 | length 8.6
  Top Layer w0.254: GaN10.4@99.425,64.8 100.375,64.8 101.6,63.575 P1.2@107.485,63.575
D6PL: GaN10.5 P1.6 | length 8.9
  Top Layer w0.254: GaN10.5@99.425,66.6 100.35,66.6 102.405,68.655 P1.6@107.485,68.655
D7: Ca35.1 Cf35.1 FPDT8.8 | length 56.4
  Bottom Layer w0.254: FPDT8.8@34.962,54.422 36.309,53.075 42.2,53.075 53.675,41.6 75.5,41.6 76.35,42.45 80.775,42.45 81.7,43.375 Cf35.1@81.7,43.95 81.775,43.875 Ca35.1@84.675,43.875
D7NH: GaN15.4 P1.1 | length 16.5
  Bottom Layer w0.254: GaN15.4@99.6,51.8 100.3,51.8 110.025,61.525 P1.1@110.025,63.575
D7NL: GaN15.5 P1.5 | length 24.5
  Bottom Layer w0.254: GaN15.5@99.6,50 100.275,50 111.35,61.075 111.35,67.33 P1.5@110.025,68.655
D7PH: GaN11.4 P1.7 | length 27.9
  Top Layer w0.254: GaN11.4@99.6,49.975 100.675,49.975 112.125,61.425 112.125,69.095 P1.7@110.025,71.195
D7PL: GaN11.5 P1.3 | length 20.5
  Top Layer w0.254: GaN11.5@99.6,51.775 100.9,51.775 111.35,62.225 111.35,64.79 P1.3@110.025,66.115
D8: Ca40.1 Cf40.1 FPDT8.5 | length 68.9
  Bottom Layer w0.254: FPDT8.5@27.596,54.422 33.118,48.9 41.175,48.9 52.05,38.025 64.075,38.025 73.375,28.725 81.2,28.725 82.05,29.575 Cf40.1@82.05,29.925 84,29.925 84.075,30 Ca40.1@85.1,30
D8NH: GaN16.4 P1.9 | length 42.3
  Bottom Layer w0.254: GaN16.4@99.55,37.8 100.225,37.8 112.05,49.625 112.05,71.875 P1.9@110.19,73.735
D8NL: GaN16.5 P1.15 | length 52.7
  Bottom Layer w0.254: GaN16.5@99.55,36 100.375,36 113.025,48.65 113.025,78.355 P1.15@110.025,81.355
D8PH: GaN12.4 P1.17 | length 56.4
  Top Layer w0.254: GaN12.4@99.55,35.975 100.375,35.975 114.475,50.075 114.475,79.445 P1.17@110.025,83.895
D8PL: GaN12.5 P1.13 | length 48.3
  Top Layer w0.254: GaN12.5@99.55,37.775 100.3,37.775 113.075,50.55 113.075,75.765 P1.13@110.025,78.815
E1: Ca1.2 Ca2.2 Ca3.2 Ca4.2 Ca5.2 Cf1.2 Cf2.2 Cf3.2 Cf4.2 Cf5.2 FPDT1.1 FPDT2.1 FPDT3.1 FPDT4.1 L1.2 L2.1 | length 102
  Top Layer w0.254: FPDT1.1@59.598,123.332 65.466,129.2 74.85,129.2 77.375,131.725 79.35,131.725 79.7,132.075 79.7,134.025 ; L2.1@77.725,138.625 L2.1@77.6,138.5 ; Cf3.2@78.525,134 Ca3.2@76.45,134 76.45,136.1 77.6,137.25 L2.1@77.6,138.5 ; Cf3.2@78.975,134.025 79.7,134.025 ; v1(79.7,135.425) 79.7,134.025 ; Ca2.2@80.8,134.025 Cf2.2@82.75,134.025 ; Ca2.2@80.975,134.025 79.7,134.025 ; Cf2.2@82.825,134.025 Cf2.2@82.75,134.025 ; L2.1@77.6,138.5 77.6,140.775 78.625,141.8 Cf1.2@78.625,142.9 80.5,142.9 Ca1.2@80.525,142.925 80.525,141.775 81.6,140.7 L1.2@81.6,138.55 81.6,137.25 82.75,136.1 Cf2.2@82.75,134.025
  Bottom Layer w0.254: FPDT4.1@27.594,123.332 28.901,122.025 36.955,122.025 FPDT3.1@38.262,123.332 39.569,122.025 47.623,122.025 FPDT2.1@48.93,123.332 50.237,122.025 58.291,122.025 FPDT1.1@59.598,123.332 ; Cf5.2@74.975,133.975 85.275,133.975 Ca4.2@85.35,134.05 ; Ca5.2@78.474,134 Ca5.2@78.484,133.99 ; 79.7,133.99 v1(79.7,135.425) ; Cf4.2@82.75,134 Cf4.2@82.775,134.025
E2: Ca6.2 Ca7.2 Ca8.2 Ca9.2 Ca10.2 Cf6.2 Cf7.2 Cf8.2 Cf9.2 Cf10.2 FPDT1.12 FPDT2.12 FPDT3.12 FPDT4.12 L3.2 L4.1 | length 85.8
  Top Layer w0.254: FPDT1.12@67.218,123.332 68.368,123.332 69.725,121.975 77.025,121.975 ; L4.1@77.6,124.575 L4.1@77.725,124.7 ; L4.1@77.725,124.65 L4.1@77.6,124.525 ; Cf7.2@78.975,120.05 79.975,120.05 ; Cf7.2@79.1,120.025 77.025,120.025 77.025,121.975 ; v1(79.975,121.475) 79.975,120.05 ; Ca8.2@80.95,120.05 82.975,120.05 82.975,121.9 81.6,123.275 81.6,126.725 80.525,127.8 80.525,128.95 80.5,128.925 78.625,128.925 78.625,127.825 77.6,126.8 L4.1@77.6,124.525 ; Ca8.2@80.975,120.05 79.975,120.05 ; 77.025,121.975 77.6,122.55 L4.1@77.6,124.525
  Bottom Layer w0.254: FPDT4.12@34.96,123.332 36.267,124.639 44.321,124.639 45.628,123.332 46.935,124.639 54.989,124.639 56.296,123.332 57.603,124.639 65.657,124.639 FPDT1.12@66.964,123.332 ; Cf10.2@75.525,120.025 79.975,120.025 ; Ca10.2@79.049,120.025 Ca10.2@79.059,120.015 ; 79.975,120.015 79.975,120.025 ; v1(79.975,121.475) 79.975,120.025 ; Cf9.2@80.965,120.015 Cf9.2@80.975,120.025 ; Cf9.2@82.925,120.05 Cf9.2@82.9,120.025 ; Ca9.2@84.9,120.075 84.85,120.025 Cf9.2@82.9,120.025 ; 79.975,120.025 Cf9.2@82.9,120.025
E3: Ca11.2 Ca12.2 Ca13.2 Ca14.2 Ca15.2 Cf11.2 Cf12.2 Cf13.2 Cf14.2 Cf15.2 FPDT1.9 FPDT2.9 FPDT3.9 FPDT4.9 L5.2 L6.1 | length 88.8
  Top Layer w0.254: FPDT4.9@35.087,115.712 36.394,114.405 44.448,114.405 FPDT3.9@45.755,115.712 47.062,114.405 55.116,114.405 FPDT2.9@56.423,115.712 57.73,114.405 65.784,114.405 FPDT1.9@67.091,115.712 71.688,115.712 L6.1@77.725,109.675 ; L6.1@77.85,109.8 L6.1@77.725,109.675 ; Cf13.2@78.65,105.175 Ca13.2@76.575,105.175 76.575,107.275 77.725,108.425 L6.1@77.725,109.675 ; Cf13.2@79.1,105.2 79.675,105.2 ; v1(79.675,106.55) 79.675,105.2 ; Ca12.2@80.925,105.2 Cf12.2@82.875,105.2 ; Ca12.2@81.1,105.2 79.675,105.2 ; Cf12.2@82.95,105.2 Cf12.2@82.875,105.2 ; L6.1@77.725,109.675 77.725,111.95 78.75,112.975 Cf11.2@78.75,114.075 80.625,114.075 Ca11.2@80.65,114.1 80.65,112.95 81.725,111.875 L5.2@81.725,109.725 81.725,108.425 82.875,107.275 Cf12.2@82.875,105.2
  Bottom Layer w0.254: Cf14.2@75.125,105.25 75.175,105.3 79.687,105.3 ; Ca14.2@78.45,105.15 Ca14.2@78.5,105.2 ; v1(79.675,106.55) 79.687,106.538 79.687,105.3 ; 79.687,105.2 79.687,105.3 ; Cf15.2@82.949,105.2 Cf15.2@82.959,105.19 ; Ca15.2@84.95,105.3 Cf15.2@81.9,105.3 79.687,105.3
E4: Ca16.2 Ca17.2 Ca18.2 Ca19.2 Ca20.2 Cf16.2 Cf17.2 Cf18.2 Cf19.2 Cf20.2 FPDT1.4 FPDT2.4 FPDT3.4 FPDT4.4 L7.2 L8.1 | length 105.8
  Top Layer w0.254: FPDT4.4@27.721,115.712 29.028,117.019 37.082,117.019 FPDT3.4@38.389,115.712 39.696,117.019 47.75,117.019 FPDT2.4@49.057,115.712 50.364,117.019 58.418,117.019 FPDT1.4@59.725,115.712 ; v1(67.2,104.425) 72.275,99.35 74.525,99.35 75.9,97.975 77.725,97.975 ; L8.1@77.85,95.825 77.725,95.7 77.725,93.725 77.15,93.15 77.15,91.2 Cf17.2@79.225,91.2 ; L8.1@77.85,95.875 L8.1@77.725,95.75 77.725,97.975 ; Cf17.2@79.1,91.225 80.1,91.225 ; v1(80.1,92.8) 80.1,91.225 ; Ca18.2@81.075,91.225 83.1,91.225 83.1,93.075 81.725,94.45 81.725,97.9 80.65,98.975 80.65,100.125 80.625,100.1 78.75,100.1 78.75,99 77.725,97.975 ; Ca18.2@81.1,91.225 80.1,91.225
  Bottom Layer w0.254: FPDT1.4@59.725,115.712 64.675,110.762 64.675,106.95 v1(67.2,104.425) ; Cf19.2@75.175,91.175 75.225,91.225 Ca19.2@78.125,91.225 ; Ca19.2@77.065,91.14 77.075,91.15 79,91.15 Ca19.2@79.025,91.175 ; Ca19.2@79.184,91.19 80.137,91.19 ; v1(80.1,92.8) 80.1,91.227 80.137,91.19 ; Cf20.2@81.025,91.2 Cf20.2@83.099,91.2 ; Cf20.2@81.09,91.19 80.137,91.19 ; Cf20.2@82.175,91.225 85.225,91.225 Ca20.2@85.25,91.2